# EAGLE board breakout (EAGLE 5.11)
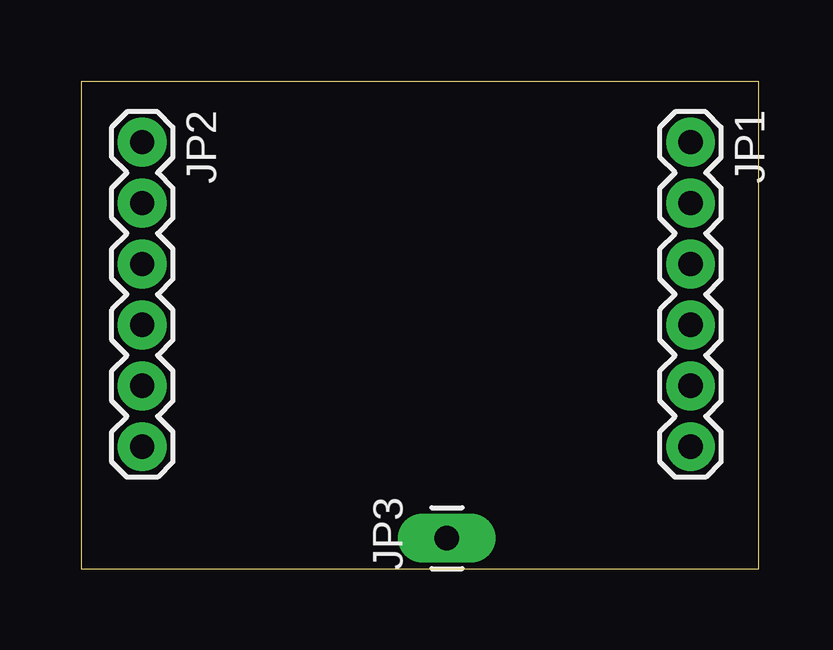
[diagram p0: board, top side]
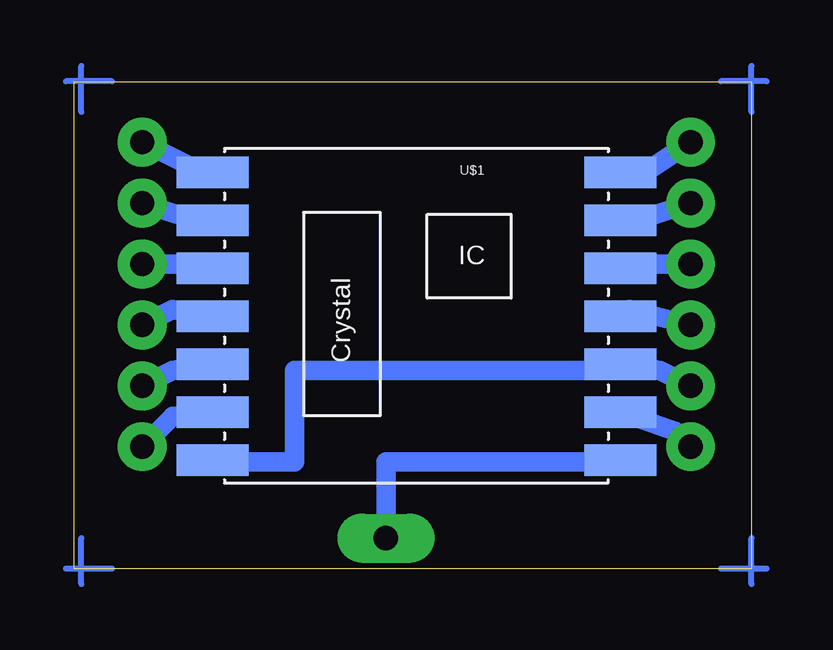
[diagram p1: board, bottom side, seen from below]

Size 28.25 x 20.31 mm. Coordinates in mm from the lower left corner, seen from the top.
Outline: 0,0 28.25,0 28.25,20.31 0,20.31 0,0
Copper layers (1*16): Top 0.035mm / dielectric 1.5mm / Bottom 0.035mm
Design rules "home1 *": minimum track width 20mil, minimum drill 25mil, track to track 10mil, track to pad 10mil, pad to pad 10mil, via to via 10mil, smd to smd 10mil, copper to edge 40mil, drill to drill 10mil, minimum pad ring 20mil, minimum via ring 10mil, stop-mask expansion 8mil, vias tented up to drill 0mil, thermal gap 10mil

## Footprints (pad centres in the part's own frame; a part is rotated, then mirrored left to right if it is on the bottom)
1X06 = drill 1.016 pad 1.88 round: 1 0,0; 2 2.54,0; 3 5.08,0; 4 7.62,0; 5 10.16,0; 6 12.7,0
1X01_LONGPAD = drill 1.016 pad 1.88 long: 1 0,0
RFM12SB = smd 3 x 1.3: 1 -8.5,7; 2 -8.5,5; 3 -8.5,3; 4 -8.5,1; 5 -8.5,-1; 6 -8.5,-3; 7 -8.5,-5; 8 8.5,-5; 9 8.5,-3; 10 8.5,-1; 11 8.5,1; 12 8.5,3; 13 8.5,5; 14 8.5,7

## Placement (x,y rotation side)
JP1  [1X06]  25.4,17.78 270 top
JP2  [1X06]  2.54,17.78 270 top
JP3  [1X01_LONGPAD]  15.24,1.27 90 top
U$1  [RFM12SB]  13.97,9.53 0 bottom

## Library data of the parts
JP1-JP3 = SparkFun
U$1 = Tropotek

## Nets
GND: JP2.5 U$1.7 U$1.10
N$1: JP3.1 U$1.8
N$2: JP1.1 U$1.1
N$3: JP1.2 U$1.2
N$4: JP1.3 U$1.3
N$5: JP1.4 U$1.4
N$6: JP1.5 U$1.5
N$9: JP2.1 U$1.14
N$10: JP2.2 U$1.13
N$11: JP2.3 U$1.12
N$12: JP2.4 U$1.11
N$13: JP2.6 U$1.9
N$14: JP1.6 U$1.6

## Tracks (layer width: path | path; a pad name or v marks a point on that pad's centre or on a via)
GND
  Bottom 0.61: 22.23,4.45 22.3,4.53 U$1.7 | U$1.10 5.47,8.5 5.71,8.26
  Bottom 0.813: 22.23,4.45 19.05,4.45 19.05,8.26 5.71,8.26 | JP2.5 3.81,8.26 U$1.10
N$1
  Bottom 0.381: 5.63,4.53 5.71,4.45
  Bottom 0.813: U$1.8 5.63,4.53 | 5.71,4.45 15.24,4.45 JP3.1
N$2
  Bottom 0.813: JP1.1 22.86,16.51 U$1.1
N$3
  Bottom 0.813: U$1.2 23.5,14.61 JP1.2
N$4
  Bottom 0.813: U$1.3 22.86,12.7 JP1.3
N$5
  Bottom 0.813: U$1.4 24.13,10.79 JP1.4
N$6
  Bottom 0.813: U$1.5 24.13,8.26 JP1.5
N$9
  Bottom 0.61: 4.45,16.51 U$1.14
  Bottom 0.813: JP2.1 4.45,16.51
N$10
  Bottom 0.813: U$1.13 4.45,14.61 JP2.2
N$11
  Bottom 0.813: U$1.12 4.45,12.7 JP2.3
N$12
  Bottom 0.813: JP2.4 5.08,10.79 U$1.11
N$13
  Bottom 0.813: U$1.9 3.17,5.71 JP2.6
N$14
  Bottom 0.813: U$1.6 24.13,6.35 JP1.6
N$15
  Bottom 0.254: 0,-0.64 0,1.27
N$16
  Bottom 0.254: -0.64,0 1.27,0
N$17
  Bottom 0.254: 26.67,0 28.57,0
N$18
  Bottom 0.254: 27.94,-0.64 27.94,1.27
N$19
  Bottom 0.254: 0,19.05 0,20.95
N$20
  Bottom 0.254: -0.64,20.32 1.27,20.32
N$21
  Bottom 0.254: 26.67,20.32 28.57,20.32
N$22
  Bottom 0.254: 27.94,19.05 27.94,20.95